# Altium PCB esc_backup.PcbDoc (part 2 of 2)
Units mil, origin at the board's own origin, x right, y up, seen from the top; angles counter-clockwise.
Board outline 1181.1 x 1181.1 mil, 2 copper layers (Top Layer, Bottom Layer); 362 components, 209 nets, 906 pads, 130 vias.
Unrouted connection lines stored in the file: 531.
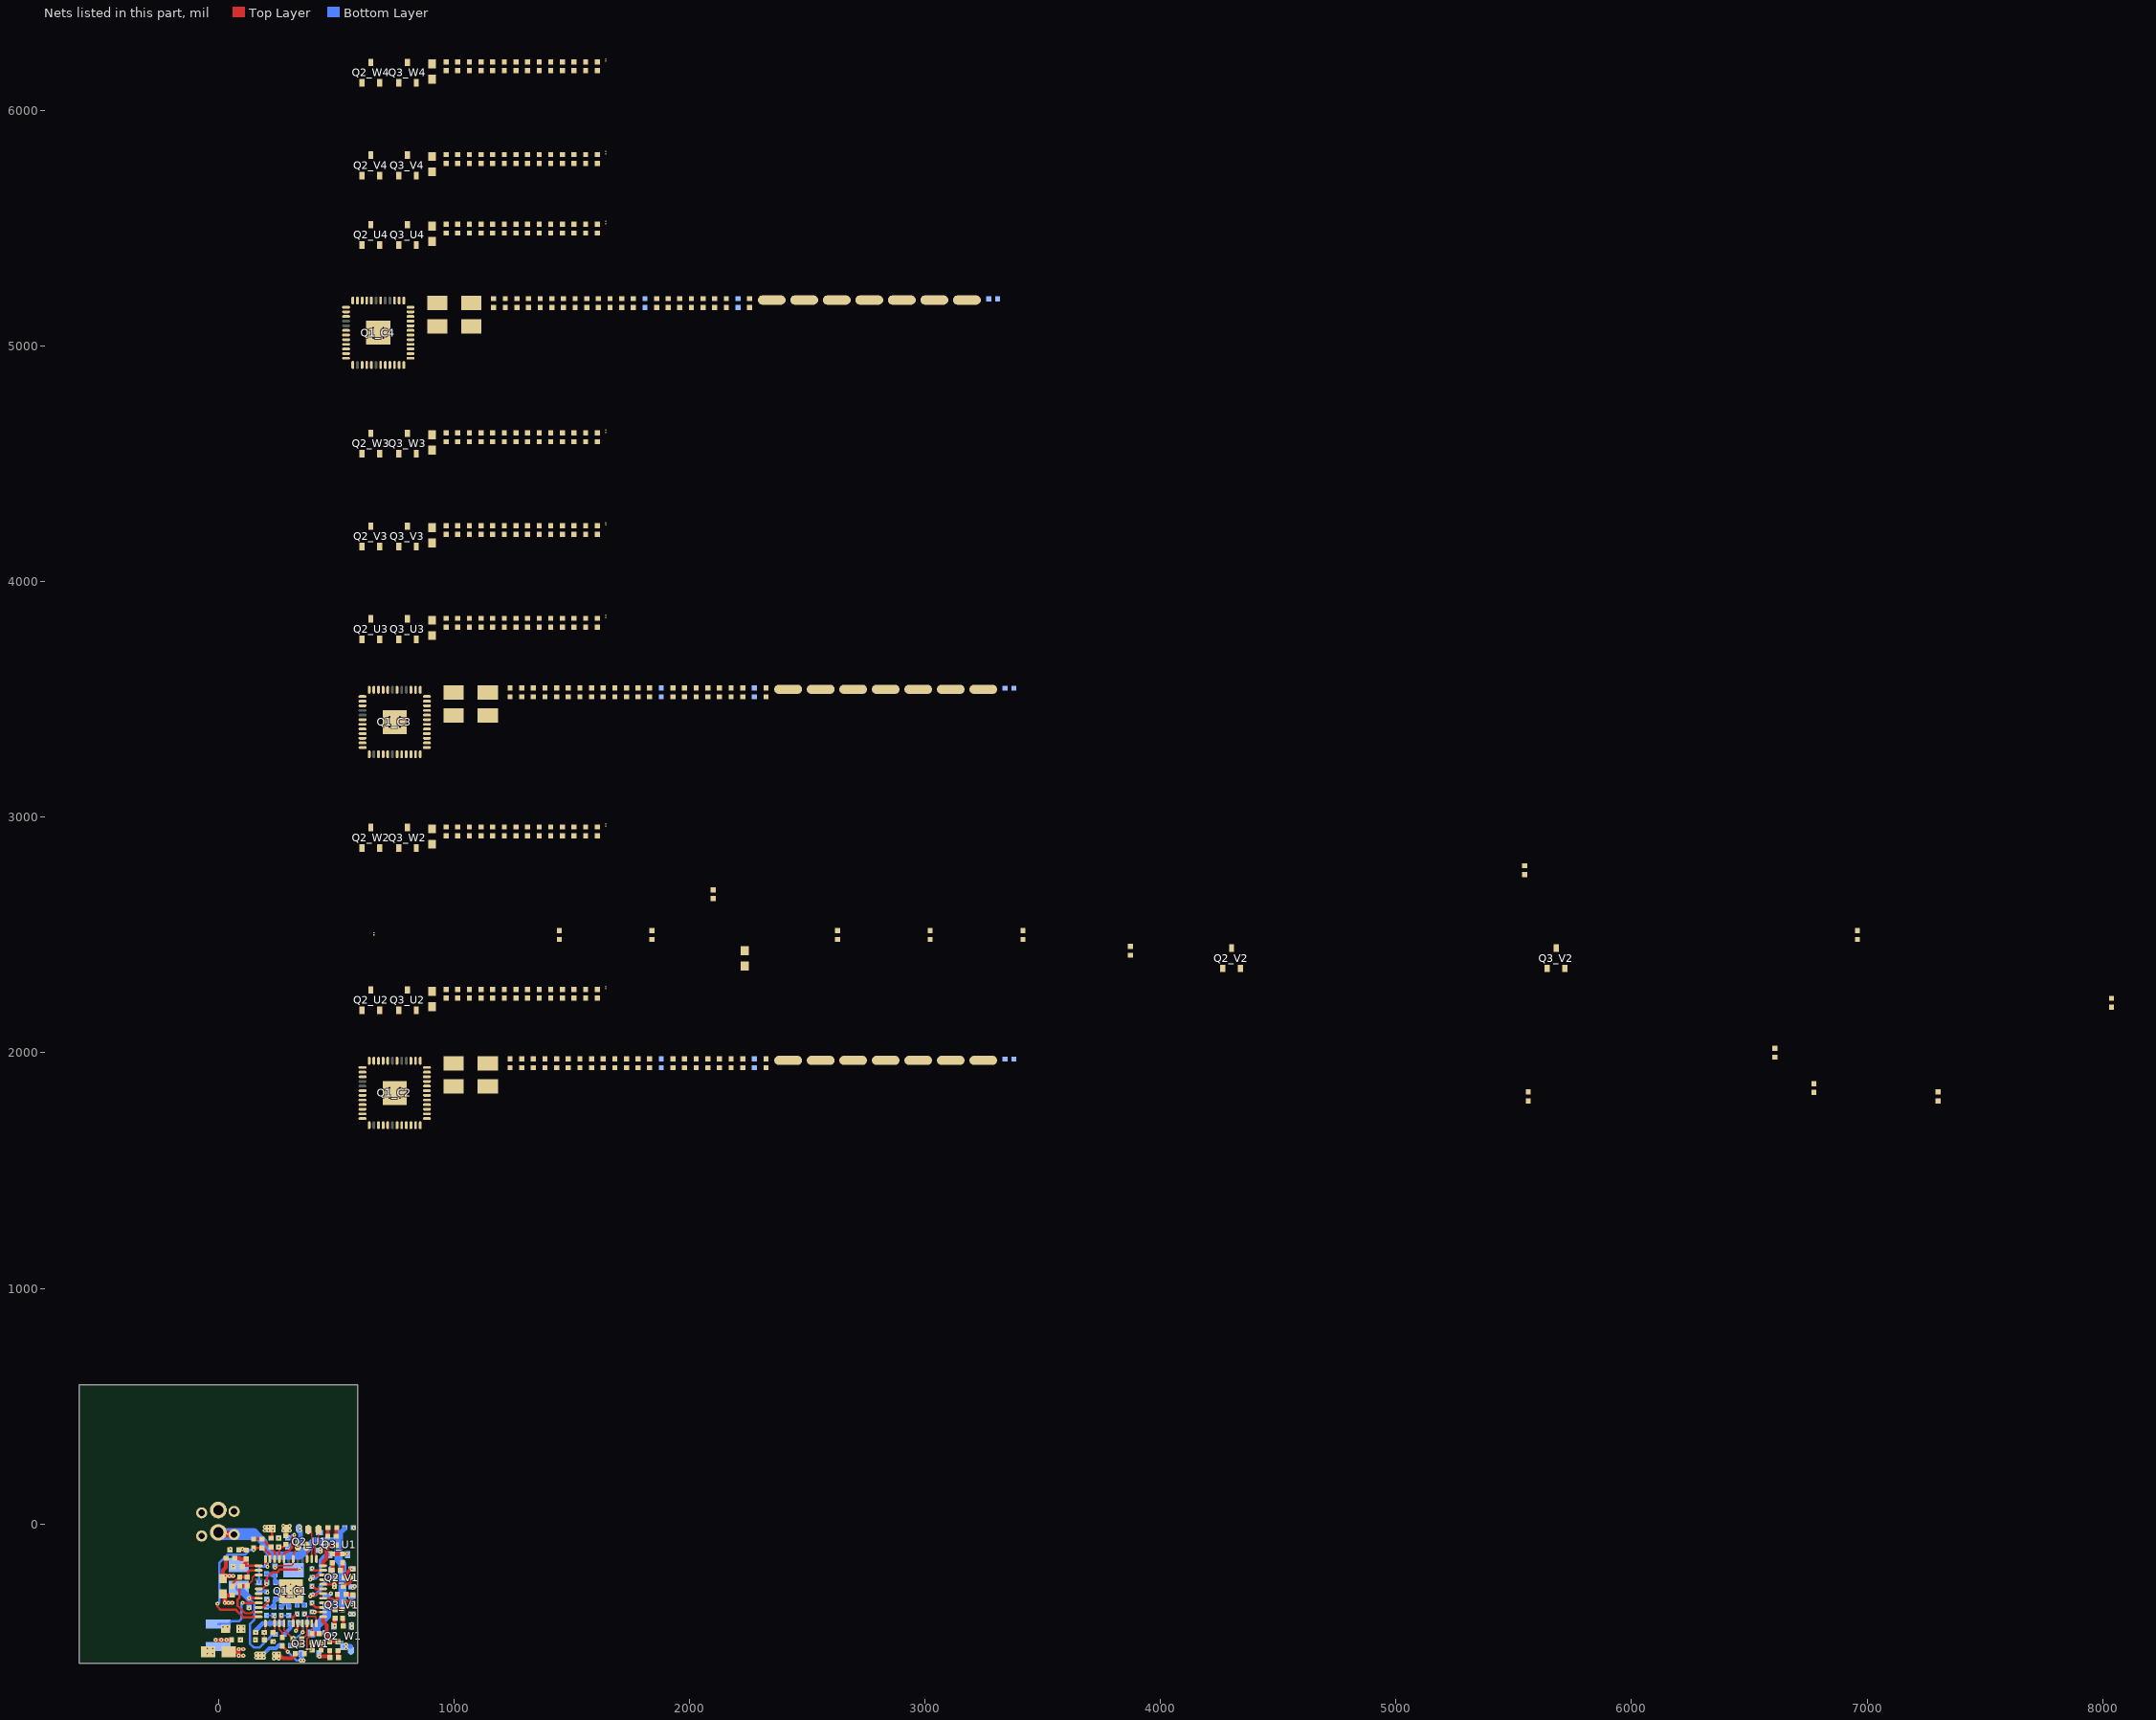
[diagram p2: the nets of this part, all layers, seen from the top]

## Part data
12V BT_C1 BT_C2 BT_C3 BT_C4 CK_C1 CK_C2 CK_C3 CK_C4 G IO_C1 IO_C2 IO_C3 IO_C4 RX_C1 RX_C2 RX_C3 RX_C4 U_C1 U_C2 U_C3 U_C4 V_C1 V_C2 V_C3 V_C4 W_C1 W_C2 W_C3 W_C4: library part Socket, "Socket", LatestRevisionDate=17-Jul-2002, LatestRevisionNote="Re-released for DXP Platform.", Publisher="Altium Limited"
C1_C1 C1_C2 C1_C3 C1_C4 C2_C1 C2_C2 C2_C3 C2_C4 C3_C1 C3_C2 C3_C3 C3_C4 C5_C1 C5_C2 C5_C3 C5_C4 C6_C1 C6_C2 C6_C3 C6_C4 C7_C1 C7_C2 C7_C3 C7_C4 C8_C1 C8_C2 C8_C3 C8_C4 C9_C1 C9_C2 C9_C3 C9_C4 C10_C1 C10_C2 C10_C3 C10_C4 C11_C1 C11_C2 C11_C3 C11_C4 C12_C1 C12_C2 C12_C3 C12_C4 C14_C1 C14_C2 C14_C3 C14_C4 C15_C1 C15_C2 C15_C3 C15_C4 C16_U1 C16_U2 C16_U3 C16_U4 C16_V1 C16_V2 C16_V3 C16_V4 C16_W1 C16_W2 C16_W3 C16_W4 C17_U1 C17_U2 C17_U3 C17_U4 C17_V1 C17_V2 C17_V3 C17_V4 C17_W1 C17_W2 C17_W3 C17_W4 C18_U1 C18_U2 C18_U3 C18_U4 C18_V1 C18_V2 C18_V3 C18_V4 C18_W1 C18_W2 C18_W3 C18_W4 C19_U1 C19_U2 C19_U3 C19_U4 C19_V1 C19_V2 C19_V3 C19_V4 C19_W1 C19_W2 C19_W3 C19_W4 C23: library part Cap, "Capacitor", LatestRevisionDate=17-Jul-2002, LatestRevisionNote="Re-released for DXP Platform.", PackageDescription="Radial Cap, Thru-Hole; 2 Leads; 0.3 in Pin Spacing", PackageReference=RAD-0.3, Published=8-Jun-2000, Publisher="Altium Limited"
C4_C1 C4_C2 C4_C3 C4_C4 C13_C1 C13_C2 C13_C3 C13_C4 C20 C21 C22: library part "Cap Pol3", "Polarized Capacitor (Surface Mount)", LatestRevisionDate=29-May-2009, LatestRevisionNote="IPC-7351 Footprint Added.", PackageDescription="Chip Capacitor", PackageReference=C0805, Published=8-Jun-2000, Publisher="Altium Limited"
D1_U1 D1_U2 D1_U3 D1_U4 D1_V1 D1_V2 D1_V3 D1_V4 D1_W1 D1_W2 D1_W3 D1_W4 D2_U1 D2_U2 D2_U3 D2_U4 D2_V1 D2_V2 D2_V3 D2_V4 D2_W1 D2_W2 D2_W3 D2_W4 D3: library part Diode, "Default Diode", Code_JEDEC=DO-214-AB, LatestRevisionDate=17-Jul-2002, LatestRevisionNote="Re-released for DXP Platform.", PackageDescription="DO-214-AB/SMC; 2 C-Bend Leads; Body 7.9 x 5.9 mm, inc. leads (LxW)", PackageReference=SMC, PackageVersion=Sep-1996, Published=8-Jun-2000, Publisher="Altium Limited"
L1: library part Inductor, "Inductor", Code_IEC=1005, Code_JEITA=0402, LatestRevisionDate=29-May-2009, LatestRevisionNote="IPC-7351 Footprint Added.", PackageDescription="Chip Inductor", PackageReference=0402-A, Published=8-Jun-2000, Publisher="Altium Limited"
Q2_U1 Q2_U2 Q2_U3 Q2_U4 Q2_V1 Q2_V2 Q2_V3 Q2_V4 Q2_W1 Q2_W2 Q2_W3 Q2_W4 Q3_U1 Q3_U2 Q3_U3 Q3_U4 Q3_V1 Q3_V2 Q3_V3 Q3_V4 Q3_W1 Q3_W2 Q3_W3 Q3_W4: library part MOSFET-N, "N-Channel MOSFET", LatestRevisionDate=17-Jul-2002, LatestRevisionNote="Re-released for DXP Platform.", PackageDescription="TO, Flat Index; 3 In-Line, Axial Leads; Body Dia. 4.6mm; Lead Dia. 0.5 mm (max)", PackageReference=E3, PackageVersion=1995/1996, Published=8-Jun-2000, Publisher="Altium Limited"
R1_U1 R1_U2 R1_U3 R1_U4 R1_V1 R1_V2 R1_V3 R1_V4 R1_W1 R1_W2 R1_W3 R1_W4 R2_U1 R2_U2 R2_U3 R2_U4 R2_V1 R2_V2 R2_V3 R2_V4 R2_W1 R2_W2 R2_W3 R2_W4 R3_U1 R3_U2 R3_U3 R3_U4 R3_V1 R3_V2 R3_V3 R3_V4 R3_W1 R3_W2 R3_W3 R3_W4 R4_U1 R4_U2 R4_U3 R4_U4 R4_V1 R4_V2 R4_V3 R4_V4 R4_W1 R4_W2 R4_W3 R4_W4 R5_U1 R5_U2 R5_U3 R5_U4 R5_V1 R5_V2 R5_V3 R5_V4 R5_W1 R5_W2 R5_W3 R5_W4 R6_C1 R6_C2 R6_C3 R6_C4 R7_C1 R7_C2 R7_C3 R7_C4 R8_C1 R8_C2 R8_C3 R8_C4 R9_C1 R9_C2 R9_C3 R9_C4 R10_C1 R10_C2 R10_C3 R10_C4 R11_C1 R11_C2 R11_C3 R11_C4 R12_C1 R12_C2 R12_C3 R12_C4 R13_C1 R13_C2 R13_C3 R13_C4 R14_C1 R14_C2 R14_C3 R14_C4 R15_C1 R15_C2 R15_C3 R15_C4 R16_C1 R16_C2 R16_C3 R16_C4 R17_U1 R17_U2 R17_U3 R17_U4 R17_V1 R17_V2 R17_V3 R17_V4 R17_W1 R17_W2 R17_W3 R17_W4 R18_U1 R18_U2 R18_U3 R18_U4 R18_V1 R18_V2 R18_V3 R18_V4 R18_W1 R18_W2 R18_W3 R18_W4 R19_U1 R19_U2 R19_U3 R19_U4 R19_V1 R19_V2 R19_V3 R19_V4 R19_W1 R19_W2 R19_W3 R19_W4 R20_U1 R20_U2 R20_U3 R20_U4 R20_V1 R20_V2 R20_V3 R20_V4 R20_W1 R20_W2 R20_W3 R20_W4: library part Res3, "Resistor", LatestRevisionDate=29-May-2009, LatestRevisionNote="IPC-7351 Footprint Added.", PackageDescription="Chip Resistor", PackageReference=J1-0603, Published=8-Jun-2000, Publisher="Altium Limited"

## Via types
v1: diameter 17.72, hole 5.91, Top Layer to Bottom Layer, tented both sides, 114 vias
v2: diameter 19.68, hole 7.87, Top Layer to Bottom Layer, 16 vias

## Nets (pads, with @x,y where several pads share a name; then routed paths per layer and width w, separated by ;. In a path a pad name is that pad's centre, name@x,y a point inside that pad or via, vN(x,y) a via of type N, cw(c..) or ccw(c..) an arc to the next point about the centre after c; other vN are vias at no path point)
GND: C1_C1.1 C1_C2.1 C1_C3.1 C1_C4.1 C2_C1.2 C2_C2.2 C2_C3.2 C2_C4.2 C4_C1.2 C4_C2.2 C4_C3.2 C4_C4.2 C5_C1.1 C5_C2.1 C5_C3.1 C5_C4.1 C6_C1.1 C6_C2.1 C6_C3.1 C6_C4.1 C8_C1.2 C8_C2.2 C8_C3.2 C8_C4.2 C10_C1.2 C10_C2.2 C10_C3.2 C10_C4.2 C11_C1.1 C11_C2.1 C11_C3.1 C11_C4.1 C12_C1.2 C12_C2.2 C12_C3.2 C12_C4.2 C13_C1.2 C13_C2.2 C13_C3.2 C13_C4.2 C14_C1.2 C14_C2.2 C14_C3.2 C14_C4.2 C15_C1.2 C15_C2.2 C15_C3.2 C15_C4.2 C16_U1.1 C16_U2.1 C16_U3.1 C16_U4.1 C16_V1.1 C16_V2.1 C16_V3.1 C16_V4.1 C16_W1.1 C16_W2.1 C16_W3.1 C16_W4.1 C17_U1.2 C17_U2.2 C17_U3.2 C17_U4.2 C17_V1.2 C17_V2.2 C17_V3.2 C17_V4.2 C17_W1.2 C17_W2.2 C17_W3.2 C17_W4.2 C18_U1.1 C18_U2.1 C18_U3.1 C18_U4.1 C18_V1.1 C18_V2.1 C18_V3.1 C18_V4.1 C18_W1.1 C18_W2.1 C18_W3.1 C18_W4.1 C20.2 C21.2 C22.2 C23.1 D3.1 G.1 N1_U1.1 N1_U2.1 N1_U3.1 N1_U4.1 N1_V1.1 N1_V2.1 N1_V3.1 N1_V4.1 N1_W1.1 N1_W2.1 N1_W3.1 N1_W4.1 Q1_C1.20 Q1_C1.44 Q1_C1.EPAD Q1_C2.20 Q1_C2.44 Q1_C2.EPAD Q1_C3.20 Q1_C3.44 Q1_C3.EPAD Q1_C4.20 Q1_C4.44 Q1_C4.EPAD R6_C1.1 R6_C2.1 R6_C3.1 R6_C4.1 R7_C1.1 R7_C2.1 R7_C3.1 R7_C4.1 R10_C1.2 R10_C2.2 R10_C3.2 R10_C4.2 R13_C1.2 R13_C2.2 R13_C3.2 R13_C4.2 R16_C1.1 R16_C2.1 R16_C3.1 R16_C4.1 | length 1078.7
  Top Layer w6: Q1_C1.20@337.6,-422.24 Q1_C1.20@338.58,-423.23
  Top Layer w10: Q1_C1.44@278.54,-148.62 278.54,-126.97 287.4,-118.11 295.28,-118.11 312.8,-100.58 312.8,-57.28 v1(322.55,-47.53) ; v1(329.57,-452.76) 329.99,-452.76 335.82,-446.93 335.82,-424.02 Q1_C1.20@337.6,-422.24
  Top Layer w16: C20.2@43.31,-543.31 86.61,-543.31 ; v1(106.3,-559.06) v1(86.61,-559.06) 86.61,-543.31 ; v1(106.3,-531.5) v1(86.61,-531.5) 86.61,-543.31 ; C17_W1.2@397.64,-502.95 398.62,-503.94 v1(398.62,-519.68) C18_W1.1@398.62,-535.43
  Bottom Layer w6: C16_V1.1@452.76,-460.63 C16_V1.1@460.63,-468.5
  Bottom Layer w10: C5_C1.1@204.72,-351.38 R10_C1.2@236.22,-351.38 ; C17_U1.2@294.29,-98.43 314.77,-77.94 314.77,-59.01 322.55,-51.23 v1(322.55,-47.53) 314.67,-47.53 303.15,-59.06 C18_U1.1@294.29,-59.06
  Bottom Layer w16: C1_C1.1@204.72,-211.61 219.49,-211.61 224.41,-216.54 239.17,-216.54 R7_C1.1@240.16,-215.55 240.16,-245.08 C6_C1.1@243.11,-248.03 270.67,-248.03 v2(286.42,-263.78) 262.8,-287.4 C8_C1.2@242.13,-287.4 ; R10_C1.2@236.22,-351.38 236.22,-325.79 C10_C1.2@243.11,-318.9 274.61,-318.9 v2(286.42,-307.09) ; C11_C1.1@267.72,-351.38 286.42,-332.68 v2(286.42,-307.09) ; R13_C1.2@299.21,-351.38 299.21,-319.88 298.72,-319.39 v2(286.42,-307.09) ; v2(329.72,-307.09) 329.72,-308.07 C4_C1.2@334.65,-312.99 ; C15_C1.2@334.65,-344.49 C4_C1.2@334.65,-312.99 ; C14_C1.2@366.14,-344.49 C4_C1.2@334.65,-312.99 ; C16_W1.1@452.76,-304.13 471.46,-304.13 478.24,-297.35 v1(478.24,-295.28) ; C16_V1.1@460.63,-468.5 v1(492.13,-468.5)
  Bottom Layer w20: v1(158.46,-460.63) 158.46,-452.34 189.54,-421.26 R16_C1.1@268.7,-421.26
  other v1: 161.42,-566.93 161.42,-551.18 93.5,-492.13 86.61,-452.76 106.3,-452.76 86.61,-437.01 106.3,-437.01 129.92,-358.27 27.56,-334.65 43.31,-334.65 59.06,-334.65 307.09,-311.02 275.59,-283.46 307.09,-283.46 342.52,-283.46 307.09,-255.91 63.98,-181.1 51.18,-106.3 196.85,-27.56 574.8,-15.75 196.85,-11.81
  other v2: 329.72,-263.78 727.18,1807.78 770.49,1807.78 727.18,1851.09 770.49,1851.09 727.18,3382.58 770.49,3382.58 727.18,3425.89 770.49,3425.89 657.57,5035.18 700.88,5035.18 657.57,5078.49 700.88,5078.49
NetBT_C1_1: BT_C1.1 Q1_C1.42 R7_C1.2 | length 175.1
  Top Layer w6: v1(240.16,-185.04) 248.44,-185.04 256.32,-177.17 311.02,-177.17 317.91,-170.28 Q1_C1.42@317.91,-148.62 318.9,-147.64 318.9,-122.05 338.58,-102.36 BT_C1.1@338.58,-94.49
  Bottom Layer w10: v1(240.16,-185.04) R7_C1.2@240.16,-178.15
NetBT_C2_1: BT_C2.1 Q1_C2.42 R7_C2.2
NetBT_C3_1: BT_C3.1 Q1_C3.42 R7_C3.2
NetBT_C4_1: BT_C4.1 Q1_C4.42 R7_C4.2
NetC3_C1_1: C3_C1.1 Q1_C1.35 | length 50.5
  Top Layer w10: v1(397.64,-188.98) 405.51,-196.85 Q1_C1.35@444.88,-196.85
NetC3_C1_2: C3_C1.2 Q1_C1.34 Q2_U1.D Q3_U1.S R8_C1.1 U_C1.1 | length 259
  Top Layer w10: v1(401.57,-224.41) 409.45,-224.41 417.01,-216.85 Q1_C1.34@444.88,-216.85
  Bottom Layer w16: v1(401.57,-224.41) 407.04,-224.41 410.98,-228.35 433.07,-206.25 433.07,-153.54 448.58,-138.03 451.1,-138.03 459.21,-129.92 Q3_U1.S@474.41,-129.92
  Bottom Layer w20: Q2_U1.D@342.52,-74.8 348.69,-68.63 348.69,-29.8 v1(346.46,-27.56) v1(346.46,-11.81)
  other v1: 157.48,-492.13 389.76,-236.22
NetC3_C2_1: C3_C2.1 Q1_C2.35
NetC3_C2_2: C3_C2.2 Q1_C2.34 Q2_U2.D Q3_U2.S R8_C2.1 U_C2.1
NetC3_C3_1: C3_C3.1 Q1_C3.35
NetC3_C3_2: C3_C3.2 Q1_C3.34 Q2_U3.D Q3_U3.S R8_C3.1 U_C3.1
NetC3_C4_1: C3_C4.1 Q1_C4.35
NetC3_C4_2: C3_C4.2 Q1_C4.34 Q2_U4.D Q3_U4.S R8_C4.1 U_C4.1
NetC4_C1_1: C4_C1.1 C6_C1.2 Q1_C1.6 | length 236.9
  Top Layer w10: Q1_C1.6@171.26,-275.59 173.04,-273.81 189.5,-273.81 205.71,-257.61 v1(205.71,-255.91) 205.71,-229.71 229.52,-205.9 248.8,-205.9 261.78,-192.91 v1(346.46,-192.91)
  Bottom Layer w10: v1(346.46,-192.91) C4_C1.1@354.33,-185.04
NetC4_C2_1: C4_C2.1 C6_C2.2 Q1_C2.6
NetC4_C3_1: C4_C3.1 C6_C3.2 Q1_C3.6
NetC4_C4_1: C4_C4.1 C6_C4.2 Q1_C4.6
NetC7_C1_1: C7_C1.1 Q1_C1.31 | length 61.2
  Top Layer w10: v1(397.64,-264.76) 402.56,-264.76 413.39,-275.59 Q1_C1.31@444.88,-275.59
  Bottom Layer w10: v1(397.64,-264.76) 401.57,-264.76 C7_C1.1@405.51,-268.7
NetC7_C1_2: C7_C1.2 Q1_C1.30 Q2_V1.D Q3_V1.S R9_C1.2 V_C1.1 | length 248.9
  Top Layer w10: v1(389.76,-307.09) 407.51,-307.09 420.49,-294.1 443.39,-294.1 Q1_C1.30@444.88,-295.59
  Bottom Layer w10: v1(389.76,-307.09) 404.53,-307.09 412.16,-299.45 412.4,-299.21 ; Q2_V1.D@480.31,-233.71 Q2_V1.D@480.31,-228.35 Q2_V1.D@480.31,-224.41
  Bottom Layer w16: C7_C1.2@402.07,-300.08 401.88,-299.75 v1(401.57,-299.21) ; 412.4,-299.21 v1(401.57,-299.21) ; Q2_V1.D@480.31,-233.71 467.08,-233.71 432.83,-267.95 432.83,-279.76 431.34,-281.26 431.34,-281.8 413.66,-299.48 412.16,-299.45 v1(401.57,-299.21)
  Bottom Layer w20: Q2_V1.D@480.32,-224.41 V_C1.1@480.32,-196.85
  other v1: 236.22,-500 559.06,-381.89 574.8,-381.89
NetC7_C2_1: C7_C2.1 Q1_C2.31
NetC7_C2_2: C7_C2.2 Q1_C2.30 Q2_V2.D Q3_V2.S R9_C2.2 V_C2.1
NetC7_C3_1: C7_C3.1 Q1_C3.31
NetC7_C3_2: C7_C3.2 Q1_C3.30 Q2_V3.D Q3_V3.S R9_C3.2 V_C3.1
NetC7_C4_1: C7_C4.1 Q1_C4.31
NetC7_C4_2: C7_C4.2 Q1_C4.30 Q2_V4.D Q3_V4.S R9_C4.2 V_C4.1
NetC8_C1_1: C8_C1.1 Q1_C1.7 R11_C1.2 | length 41
  Bottom Layer w10: R11_C1.2@169.29,-287.4 C8_C1.1@204.72,-287.4 v1(208.66,-291.34)
NetC8_C2_1: C8_C2.1 Q1_C2.7 R11_C2.2
NetC8_C3_1: C8_C3.1 Q1_C3.7 R11_C3.2
NetC8_C4_1: C8_C4.1 Q1_C4.7 R11_C4.2
NetC9_C1_1: C9_C1.1 Q1_C1.27 | length 56.7
  Top Layer w10: v1(397.64,-335.63) 397.64,-338.58 412.21,-353.16 443.71,-353.16 Q1_C1.27@444.88,-354.33
NetC9_C1_2: C9_C1.2 Q1_C1.26 Q2_W1.D Q3_W1.S R12_C1.2 W_C1.1 | length 213.3
  Top Layer w6: v1(295.28,-543.31) v1@295.28,-542.32
  Top Layer w10: R12_C1.2@271.65,-518.7 v1@295.28,-542.32 ; v1(397.64,-373.03) 443.9,-373.03 Q1_C1.26@444.88,-374.02
  Bottom Layer w10: v1(295.28,-543.31) 330.71,-578.74 v1(350.39,-578.74) ; v1@539.37,-519.68 543.31,-515.75 v1(543.31,-511.81)
  Bottom Layer w20: v1(350.39,-578.74) 352.36,-576.77 Q3_W1.S@352.36,-551.18 ; v1@539.37,-519.68 W_C1.1@562.99,-519.68
  other v1: 362.2,-578.74 543.31,-527.56 409.45,-374.02
NetC9_C2_1: C9_C2.1 Q1_C2.27
NetC9_C2_2: C9_C2.2 Q1_C2.26 Q2_W2.D Q3_W2.S R12_C2.2 W_C2.1
NetC9_C3_1: C9_C3.1 Q1_C3.27
NetC9_C3_2: C9_C3.2 Q1_C3.26 Q2_W3.D Q3_W3.S R12_C3.2 W_C3.1
NetC9_C4_1: C9_C4.1 Q1_C4.27
NetC9_C4_2: C9_C4.2 Q1_C4.26 Q2_W4.D Q3_W4.S R12_C4.2 W_C4.1
NetC14_C1_1: C14_C1.1 Q1_C1.24 R15_C1.2 | length 124.9
  Top Layer w6: v1(366.14,-381.89) 377.13,-392.87 410.39,-392.87 415.51,-398 415.51,-421.42 Q1_C1.24@416.34,-422.24
  Bottom Layer w6: v1(366.14,-381.89) 377.95,-393.7 R15_C1.2@377.95,-421.26
NetC14_C2_1: C14_C2.1 Q1_C2.24 R15_C2.2
NetC14_C3_1: C14_C3.1 Q1_C3.24 R15_C3.2
NetC14_C4_1: C14_C4.1 Q1_C4.24 R15_C4.2
NetC15_C1_1: C15_C1.1 Q1_C1.19 R14_C1.1 R16_C1.2 | length 113.4
  Top Layer w10: Q1_C1.19@317.91,-422.24 317.91,-394.69 334.65,-377.95 v1(334.65,-381.89)
  Bottom Layer w16: R14_C1.1@279.53,-468.5 306.1,-441.93 R16_C1.2@306.1,-421.26
NetC15_C2_1: C15_C2.1 Q1_C2.19 R14_C2.1 R16_C2.2
NetC15_C3_1: C15_C3.1 Q1_C3.19 R14_C3.1 R16_C3.2
NetC15_C4_1: C15_C4.1 Q1_C4.19 R14_C4.1 R16_C4.2
NetCK_C1_1: CK_C1.1 Q1_C1.38 | length 132.1
  Top Layer w6: CK_C1.1@381.89,-23.62 396.65,-38.39 396.65,-77.59 397.8,-78.73 397.8,-110.24 396.65,-111.38 Q1_C1.38@396.65,-148.62
NetCK_C2_1: CK_C2.1 Q1_C2.38
NetCK_C3_1: CK_C3.1 Q1_C3.38
NetCK_C4_1: CK_C4.1 Q1_C4.38
NetD1_U1_1: D1_U1.1 Q3_U1.G R2_U1.2 | length 66.2
  Top Layer w16: R2_U1.2@484.25,-126.97 D1_U1.1@527.56,-126.97 v1(546.26,-126.97)
  Bottom Layer w16: v1(546.26,-126.97) Q3_U1.G@549.21,-129.92
NetD1_U1_2: D1_U1.2 R1_U1.2 | length 34.1
  Top Layer w16: R1_U1.2@523.62,-196.85 527.56,-192.91 D1_U1.2@527.56,-164.37
NetD1_U2_1: D1_U2.1 Q3_U2.G R2_U2.2
NetD1_U2_2: D1_U2.2 R1_U2.2
NetD1_U3_1: D1_U3.1 Q3_U3.G R2_U3.2
NetD1_U3_2: D1_U3.2 R1_U3.2
NetD1_U4_1: D1_U4.1 Q3_U4.G R2_U4.2
NetD1_U4_2: D1_U4.2 R1_U4.2
NetD1_V1_1: D1_V1.1 Q3_V1.G R2_V1.2 | length 74.7
  Top Layer w16: R2_V1.2@534.45,-330.71 563.98,-330.71 D1_V1.1@570.87,-337.6
  Bottom Layer w16: v1(566.93,-342.52) Q3_V1.G@566.93,-307.09
NetD1_V1_2: D1_V1.2 R1_V1.2 | length 29
  Top Layer w16: R1_V1.2@542.32,-299.21 569.88,-299.21 D1_V1.2@570.87,-300.2
NetD1_V2_1: D1_V2.1 Q3_V2.G R2_V2.2
NetD1_V2_2: D1_V2.2 R1_V2.2
NetD1_V3_1: D1_V3.1 Q3_V3.G R2_V3.2
NetD1_V3_2: D1_V3.2 R1_V3.2
NetD1_V4_1: D1_V4.1 Q3_V4.G R2_V4.2
NetD1_V4_2: D1_V4.2 R1_V4.2
NetD1_W1_1: D1_W1.1 Q3_W1.G R2_W1.2 | length 74
  Top Layer w16: v1(429.13,-562.99) 430.86,-561.26 D1_W1.1@472.44,-561.26 ; R2_W1.2@472.44,-537.4 D1_W1.1@472.44,-561.26 ; D1_W1.1@473.43,-566.93 472.44,-565.94 D1_W1.1@472.44,-561.26
NetD1_W1_2: D1_W1.2 R1_W1.2 | length 30.8
  Top Layer w16: R1_W1.2@507.87,-537.4 507.87,-563.98 D1_W1.2@510.83,-566.93
NetD1_W2_1: D1_W2.1 Q3_W2.G R2_W2.2
NetD1_W2_2: D1_W2.2 R1_W2.2
NetD1_W3_1: D1_W3.1 Q3_W3.G R2_W3.2
NetD1_W3_2: D1_W3.2 R1_W3.2
NetD1_W4_1: D1_W4.1 Q3_W4.G R2_W4.2
NetD1_W4_2: D1_W4.2 R1_W4.2
NetD2_U1_1: D2_U1.1 Q2_U1.G R4_U1.2 | length 36.8
  Top Layer w16: R4_U1.2@464.57,-52.17 464.57,-16.73 D2_U1.1@465.55,-15.75
NetD2_U1_2: D2_U1.2 R3_U1.2 | length 37.6
  Top Layer w16: R3_U1.2@500,-52.17 500,-18.7 D2_U1.2@502.95,-15.75
NetD2_U2_1: D2_U2.1 Q2_U2.G R4_U2.2
NetD2_U2_2: D2_U2.2 R3_U2.2
NetD2_U3_1: D2_U3.1 Q2_U3.G R4_U3.2
NetD2_U3_2: D2_U3.2 R3_U3.2
NetD2_U4_1: D2_U4.1 Q2_U4.G R4_U4.2
NetD2_U4_2: D2_U4.2 R3_U4.2
NetD2_V1_1: D2_V1.1 Q2_V1.G R4_V1.2 | length 58.1
  Top Layer w16: R4_V1.2@534.45,-228.35 534.45,-226.38 545.04,-215.79 545.04,-207.96 563.04,-189.96 D2_V1.1@570.87,-189.96
  other v1: 566.93,-190.94
NetD2_V1_2: D2_V1.2 R3_V1.2 | length 65
  Top Layer w16: R3_V1.2@530.51,-263.78 534.45,-263.78 535.2,-263.03 535.2,-254.17 551.49,-254.17 570.87,-234.8 D2_V1.2@570.87,-227.36
NetD2_V2_1: D2_V2.1 Q2_V2.G R4_V2.2
NetD2_V2_2: D2_V2.2 R3_V2.2
NetD2_V3_1: D2_V3.1 Q2_V3.G R4_V3.2
NetD2_V3_2: D2_V3.2 R3_V3.2
NetD2_V4_1: D2_V4.1 Q2_V4.G R4_V4.2
NetD2_V4_2: D2_V4.2 R3_V4.2
NetD2_W1_1: D2_W1.1 Q2_W1.G R4_W1.2 | length 37.6
  Top Layer w16: v1(493.11,-433.07) 493.11,-399.61 R4_W1.2@496.06,-396.65
NetD2_W1_2: D2_W1.2 R3_W1.2 | length 37.6
  Top Layer w16: R3_W1.2@527.56,-396.65 530.51,-399.61 D2_W1.2@530.51,-433.07
NetD2_W2_1: D2_W2.1 Q2_W2.G R4_W2.2
NetD2_W2_2: D2_W2.2 R3_W2.2
NetD2_W3_1: D2_W3.1 Q2_W3.G R4_W3.2
NetD2_W3_2: D2_W3.2 R3_W3.2
NetD2_W4_1: D2_W4.1 Q2_W4.G R4_W4.2
NetD2_W4_2: D2_W4.2 R3_W4.2
NetD3_2: D3.2 L1.2 Q1_C1.9 | length 246.2
  Top Layer w10: v1(103.18,-334.65) 120.11,-334.65 121.28,-335.82 170.09,-335.82 Q1_C1.9@171.26,-334.65
  Bottom Layer w10: L1.2@0,-425.2 39.37,-425.2 43.31,-425.2 55.12,-413.39 86.61,-413.39 98.43,-401.57 98.43,-339.4 v1(103.18,-334.65)
  other v1: 19.68,-437.01 39.37,-437.01
NetIO_C1_1: IO_C1.1 Q1_C1.37 | length 133.3
  Top Layer w6: Q1_C1.37@416.34,-148.62 416.34,-132.87 410.8,-127.33 410.8,-93.14 425.2,-78.74 IO_C1.1@425.2,-23.62
NetIO_C2_1: IO_C2.1 Q1_C2.37
NetIO_C3_1: IO_C3.1 Q1_C3.37
NetIO_C4_1: IO_C4.1 Q1_C4.37
NetN1_U1_2: N1_U1.2 R5_U1.1 R19_U1.1 | length 59.2
  Top Layer w6: R5_U1.1@217.68,-11.81 217.68,-19.68 R5_U1.1@223.43,-19.68
  Top Layer w10: R19_U1.1@224.41,-63.98 227.63,-60.76 R5_U1.1@227.63,-19.68
  other v1: 212.6,-27.56 232.28,-27.56 212.6,-11.81 232.28,-11.81
NetN1_U2_2: N1_U2.2 R5_U2.1 R19_U2.1
NetN1_U3_2: N1_U3.2 R5_U3.1 R19_U3.1
NetN1_U4_2: N1_U4.2 R5_U4.1 R19_U4.1
NetN1_V1_2: N1_V1.2 R5_V1.1 R19_V1.1 | length 108.2
  Top Layer w6: R5_V1.1@27.56,-296.26 R5_V1.1@34.45,-303.15
  Top Layer w16: R5_V1.1@34.45,-303.15 R19_V1.1@62.99,-303.15
  Top Layer w20: R5_V1.1@27.56,-296.26 N1_V1.2@27.56,-324.8 27.56,-334.65 59.06,-334.65
NetN1_V2_2: N1_V2.2 R5_V2.1 R19_V2.1
NetN1_V3_2: N1_V3.2 R5_V3.1 R19_V3.1
NetN1_V4_2: N1_V4.2 R5_V4.1 R19_V4.1
NetN1_W1_2: N1_W1.2 R5_W1.1 R19_W1.1 | length 90.5
  Bottom Layer w16: v1(192.91,-551.18) 216.54,-527.56 226.1,-527.56 226.34,-527.32 244.33,-527.32 255.91,-515.75 R19_W1.1@268.7,-515.75
  other v1: 177.17,-566.93 192.91,-566.93 177.17,-551.18
NetN1_W2_2: N1_W2.2 R5_W2.1 R19_W2.1
NetN1_W3_2: N1_W3.2 R5_W3.1 R19_W3.1
NetN1_W4_2: N1_W4.2 R5_W4.1 R19_W4.1
NetQ1_C1_25: Q1_C1.25 R1_W1.1 R2_W1.1 | length 148
  Top Layer w16: Q1_C1.25@444.88,-397.64 444.88,-413.39 460.63,-429.13 460.63,-488.19 469.49,-497.05 R1_W1.1@507.87,-497.05
NetQ1_C1_28: Q1_C1.28 R3_W1.1 R4_W1.1 | length 93.7
  Top Layer w10: Q1_C1.28@444.88,-334.65 462.36,-334.65 486.97,-359.25 R4_W1.1@496.06,-363.19
  Top Layer w16: R4_W1.1@496.06,-363.19 R3_W1.1@527.56,-363.19
NetQ1_C1_29: Q1_C1.29 R1_V1.1 R2_V1.1 | length 93.4
  Top Layer w10: Q1_C1.29@444.88,-314.96 446.06,-316.13 482.47,-316.13 R2_V1.1@497.05,-330.71
  Top Layer w16: R2_V1.1@497.05,-330.71 504.92,-322.83 R1_V1.1@504.92,-299.21
NetQ1_C1_32: Q1_C1.32 R3_V1.1 R4_V1.1 | length 98.1
  Top Layer w10: Q1_C1.32@444.88,-255.91 485.24,-255.91 492.13,-262.8 492.13,-264.76 v1(492.13,-267.72)
  Top Layer w16: R3_V1.1@492.13,-264.76 R3_V1.1@493.11,-263.78 497.05,-259.84 493.11,-255.9 v1(492.12,-255.9) 492.12,-233.27 R4_V1.1@497.05,-228.35
NetQ1_C1_33: Q1_C1.33 R1_U1.1 R2_U1.1 | length 104.4
  Top Layer w6: Q1_C1.33@444.88,-236.22 464.57,-236.22 464.57,-235.37 476.22,-223.72 476.22,-207.52 484.25,-207.52 R1_U1.1@484.25,-194.88
  Top Layer w16: R1_U1.1@484.25,-194.88 R2_U1.1@484.25,-164.37
NetQ1_C1_36: Q1_C1.36 R3_U1.1 R4_U1.1 | length 127.3
  Top Layer w16: Q1_C1.36@444.88,-173.23 444.88,-160.87 458.39,-147.37 458.43,-147.4 458.43,-109.93 464.57,-103.79 R4_U1.1@464.57,-89.57 R3_U1.1@500,-89.57
NetQ1_C1_39: Q1_C1.39 RX_C1.1 | length 55.4
  Top Layer w6: RX_C1.1@374.02,-94.49 376.97,-97.44 Q1_C1.39@376.97,-148.62
NetQ1_C2_9: Q1_C2.9
NetQ1_C2_25: Q1_C2.25 R1_W2.1 R2_W2.1
NetQ1_C2_28: Q1_C2.28 R3_W2.1 R4_W2.1
NetQ1_C2_29: Q1_C2.29 R1_V2.1 R2_V2.1
NetQ1_C2_32: Q1_C2.32 R3_V2.1 R4_V2.1
NetQ1_C2_33: Q1_C2.33 R1_U2.1 R2_U2.1
NetQ1_C2_36: Q1_C2.36 R3_U2.1 R4_U2.1
NetQ1_C2_39: Q1_C2.39 RX_C2.1
NetQ1_C3_9: Q1_C3.9
NetQ1_C3_25: Q1_C3.25 R1_W3.1 R2_W3.1
NetQ1_C3_28: Q1_C3.28 R3_W3.1 R4_W3.1
NetQ1_C3_29: Q1_C3.29 R1_V3.1 R2_V3.1
NetQ1_C3_32: Q1_C3.32 R3_V3.1 R4_V3.1
NetQ1_C3_33: Q1_C3.33 R1_U3.1 R2_U3.1
NetQ1_C3_36: Q1_C3.36 R3_U3.1 R4_U3.1
NetQ1_C3_39: Q1_C3.39 RX_C3.1
NetQ1_C4_9: Q1_C4.9
NetQ1_C4_25: Q1_C4.25 R1_W4.1 R2_W4.1
NetQ1_C4_28: Q1_C4.28 R3_W4.1 R4_W4.1
NetQ1_C4_29: Q1_C4.29 R1_V4.1 R2_V4.1
NetQ1_C4_32: Q1_C4.32 R3_V4.1 R4_V4.1
NetQ1_C4_33: Q1_C4.33 R1_U4.1 R2_U4.1
NetQ1_C4_36: Q1_C4.36 R3_U4.1 R4_U4.1
NetQ1_C4_39: Q1_C4.39 RX_C4.1
NetQ2_U1_S: Q2_U1.S R5_U1.2 R18_U1.1 | length 29.9
  Top Layer w10: R18_U1.1@287.4,-49.21 287.4,-20.67 R5_U1.2@288.39,-19.68
  other v1: 433.07,-118.11 433.07,-106.3 275.59,-27.56 303.15,-27.56 275.59,-7.87 303.15,-7.87
NetQ2_U2_S: Q2_U2.S R5_U2.2 R18_U2.1
NetQ2_U3_S: Q2_U3.S R5_U3.2 R18_U3.1
NetQ2_U4_S: Q2_U4.S R5_U4.2 R18_U4.1
NetQ2_V1_S: Q2_V1.S R5_V1.2 R18_V1.1 | length 143.3
  Top Layer w6: R5_V1.2@19.68,-231.3 28.54,-231.3 31.5,-228.35 v1(31.5,-220.47)
  Top Layer w16: R5_V1.2@19.68,-231.3 19.68,-196.85 32.48,-184.06 R18_V1.1@32.48,-145.67
  Top Layer w20: v1(31.5,-220.47) v1(47.24,-220.47) v1(62.99,-220.47)
  other v1: 570.87,-271.65 578.74,-263.78
NetQ2_V2_S: Q2_V2.S R5_V2.2 R18_V2.1
NetQ2_V3_S: Q2_V3.S R5_V3.2 R18_V3.1
NetQ2_V4_S: Q2_V4.S R5_V4.2 R18_V4.1
NetQ2_W1_S: Q2_W1.S R5_W1.2 R18_W1.1 | length 102.1
  Top Layer w6: R5_W1.2@247.05,-559.06 R5_W1.2@250.16,-562.16
  Top Layer w16: R5_W1.2@247.05,-559.06 263.78,-559.06 275.59,-570.87 312.01,-570.87 R18_W1.1@331.69,-551.18
  other v1: 236.22,-570.87 255.91,-570.87 236.22,-551.18 255.91,-551.18 566.93,-440.94 566.93,-425.2
NetQ2_W2_S: Q2_W2.S R5_W2.2 R18_W2.1
NetQ2_W3_S: Q2_W3.S R5_W3.2 R18_W3.1
NetQ2_W4_S: Q2_W4.S R5_W4.2 R18_W4.1
PS1_C1: C2_C1.1 Q1_C1.13 R6_C1.2 R8_C1.2 | length 71.9
  Top Layer w6: R8_C1.2@194.88,-492.13 195.87,-491.14 v1(195.87,-460.63) 199.8,-456.69 Q1_C1.13@199.8,-422.24
PS1_C2: C2_C2.1 Q1_C2.13 R6_C2.2 R8_C2.2
PS1_C3: C2_C3.1 Q1_C3.13 R6_C3.2 R8_C3.2
PS1_C4: C2_C4.1 Q1_C4.13 R6_C4.2 R8_C4.2
PS2_C1: C5_C1.2 Q1_C1.15 R9_C1.1 R10_C1.1 | length 108.4
  Top Layer w6: R9_C1.1@232.28,-461.61 232.28,-452.76 239.17,-445.87 Q1_C1.15@239.17,-422.24 v1(239.17,-391.73)
  Bottom Layer w6: C5_C1.2@204.72,-388.78 R10_C1.1@236.22,-388.78 v1(239.17,-391.73)
PS2_C2: C5_C2.2 Q1_C2.15 R9_C2.1 R10_C2.1
PS2_C3: C5_C3.2 Q1_C3.15 R9_C3.1 R10_C3.1
PS2_C4: C5_C4.2 Q1_C4.15 R9_C4.1 R10_C4.1
PS3_C1: C11_C1.2 Q1_C1.16 R12_C1.1 R13_C1.1 | length 140.8
  Top Layer w6: v1@267.72,-385.2 v1(267.72,-388.78) 267.72,-399.75 258.86,-408.61 Q1_C1.16@258.86,-422.24 258.86,-447.83 271.65,-460.63 R12_C1.1@271.65,-481.3
  Bottom Layer w6: C11_C1.2@264.7,-385.76 v1(267.72,-388.78) R13_C1.1@299.21,-388.78
PS3_C2: C11_C2.2 Q1_C2.16 R12_C2.1 R13_C2.1
PS3_C3: C11_C3.2 Q1_C3.16 R12_C3.1 R13_C3.1
PS3_C4: C11_C4.2 Q1_C4.16 R12_C4.1 R13_C4.1
SN1_C1: C19_W1.1 Q1_C1.22 R19_W1.2 R20_W1.2 | length 153.8
  Top Layer w6: C19_W1.1@353.35,-488.19 357.13,-488.19 376.81,-468.5 376.81,-422.24 Q1_C1.22@376.97,-422.24
  Top Layer w16: R20_W1.2@353.35,-515.75 C19_W1.1@353.35,-488.19
  Bottom Layer w16: R19_W1.2@306.1,-515.75 v1(354.33,-515.75)
SN1_C2: C19_W2.1 Q1_C2.22 R19_W2.2 R20_W2.2
SN1_C3: C19_W3.1 Q1_C3.22 R19_W3.2 R20_W3.2
SN1_C4: C19_W4.1 Q1_C4.22 R19_W4.2 R20_W4.2
SN2_C1: C19_V1.1 Q1_C1.2 R19_V1.2 R20_V1.2 | length 153.2
  Top Layer w10: R19_V1.2@62.99,-265.75 62.99,-251.73 89.33,-225.39 R20_V1.2@90.55,-225.39 ; C19_V1.1@125.98,-225.39 125.98,-204.72 133.86,-196.85 Q1_C1.2@171.26,-196.85
  Top Layer w16: R20_V1.2@90.55,-225.39 C19_V1.1@122.05,-225.39
SN2_C2: C19_V2.1 Q1_C2.2 R19_V2.2 R20_V2.2
SN2_C3: C19_V3.1 Q1_C3.2 R19_V3.2 R20_V3.2
SN2_C4: C19_V4.1 Q1_C4.2 R19_V4.2 R20_V4.2
SN3_C1: C19_U1.1 Q1_C1.46 R19_U1.2 R20_U1.2 | length 142.7
  Top Layer w10: C19_U1.1@149.61,-63.98 R20_U1.2@185.04,-63.98 186.26,-63.98 207.87,-85.58 207.87,-86.8 218.5,-97.44 R19_U1.2@224.41,-97.44 ; R19_U1.2@224.41,-101.38 224.41,-104.57 239.17,-119.33 Q1_C1.46@239.17,-148.62
SN3_C2: C19_U2.1 Q1_C2.46 R19_U2.2 R20_U2.2
SN3_C3: C19_U3.1 Q1_C3.46 R19_U3.2 R20_U3.2
SN3_C4: C19_U4.1 Q1_C4.46 R19_U4.2 R20_U4.2
SO1_C1: C19_W1.2 Q1_C1.17 Q1_C1.21 R15_C1.1 R20_W1.1 | length 240.6
  Top Layer w6: Q1_C1.17@278.54,-422.24 278.54,-449.14 315.94,-486.54 C19_W1.2@315.94,-488.19 ; v1(357.28,-458.82) Q1_C1.21@357.28,-422.24
  Top Layer w16: R20_W1.1@315.94,-515.75 C19_W1.2@315.94,-488.19
  Bottom Layer w6: v1(318.9,-484.25) 331.85,-484.25 v1(357.28,-458.82) 359.25,-456.85 359.25,-439.96 R15_C1.1@340.55,-421.26
SO1_C2: C19_W2.2 Q1_C2.17 Q1_C2.21 R15_C2.1 R20_W2.1
SO1_C3: C19_W3.2 Q1_C3.17 Q1_C3.21 R15_C3.1 R20_W3.1
SO1_C4: C19_W4.2 Q1_C4.17 Q1_C4.21 R15_C4.1 R20_W4.1
SO2_C1: C19_V1.2 Q1_C1.3 Q1_C1.11 R20_V1.1 | length 299.1
  Top Layer w6: C19_V1.2@122.05,-262.8 144.53,-240.31 144.53,-228.49 156.48,-216.54 Q1_C1.3@171.26,-216.54
  Top Layer w10: R20_V1.1@90.55,-262.8 90.55,-312.72 82.32,-320.94 82.32,-347.53 113.92,-379.13 138.56,-379.13 143.67,-374.02 Q1_C1.11@171.26,-374.02
  Top Layer w16: R20_V1.1@90.55,-262.8 C19_V1.2@122.05,-262.8
SO2_C2: C19_V2.2 Q1_C2.3 Q1_C2.11 R20_V2.1
SO2_C3: C19_V3.2 Q1_C3.3 Q1_C3.11 R20_V3.1
SO2_C4: C19_V4.2 Q1_C4.3 Q1_C4.11 R20_V4.1
SO3_C1: C19_U1.2 Q1_C1.12 Q1_C1.47 R20_U1.1 | length 654.4
  Top Layer w10: v1(-3.94,-338.58) -3.94,-350.39 9.84,-364.17 74.93,-364.17 106.88,-396.13 145.6,-396.13 148.03,-393.7 Q1_C1.12@171.26,-393.7 ; C19_U1.2@149.61,-101.38 R20_U1.1@185.04,-101.38 191.93,-101.38 201.58,-111.03 201.58,-113.24 208.61,-120.27 210.82,-120.27 219.49,-128.94 Q1_C1.47@219.49,-148.62
  Bottom Layer w10: v1(-3.94,-338.58) 3.94,-330.71 3.94,-165.35 31.31,-137.98 31.31,-137.75 38.34,-130.72 112.36,-130.72 132.84,-110.24 v1(149.61,-110.24)
SO3_C2: C19_U2.2 Q1_C2.12 Q1_C2.47 R20_U2.1
SO3_C3: C19_U3.2 Q1_C3.12 Q1_C3.47 R20_U3.1
SO3_C4: C19_U4.2 Q1_C4.12 Q1_C4.47 R20_U4.1
SP1_C1: C17_W1.1 Q1_C1.23 R17_W1.1 R18_W1.2 | length 180.5
  Top Layer w6: R18_W1.2@369.09,-559.06 370.08,-558.07 370.08,-543.31 376.81,-536.57 376.81,-487.98 397.64,-467.16 C17_W1.1@397.64,-465.55 397.64,-423.23 Q1_C1.23@396.65,-422.24
  Top Layer w16: C17_W1.1@397.64,-465.55 R17_W1.1@429.13,-465.55
SP1_C2: C17_W2.1 Q1_C2.23 R17_W2.1 R18_W2.2
SP1_C3: C17_W3.1 Q1_C3.23 R17_W3.1 R18_W3.2
SP1_C4: C17_W4.1 Q1_C4.23 R17_W4.1 R18_W4.2
SP2_C1: C17_V1.1 Q1_C1.1 R17_V1.1 R18_V1.2 | length 161.2
  Top Layer w6: R17_V1.1@121.06,-149.61 122.05,-148.62 122.05,-160.43
  Top Layer w10: C17_V1.1@101.38,-181.1 105.32,-177.17 Q1_C1.1@171.26,-177.17
  Top Layer w16: R18_V1.2@69.88,-145.67 90.55,-145.67 94.49,-149.61 R17_V1.1@121.06,-149.61 ; C17_V1.1@105.32,-177.17 122.05,-160.43
SP2_C2: C17_V2.1 Q1_C2.1 R17_V2.1 R18_V2.2
SP2_C3: C17_V3.1 Q1_C3.1 R17_V3.1 R18_V3.2
SP2_C4: C17_V4.1 Q1_C4.1 R17_V4.1 R18_V4.2
SP3_C1: C17_U1.1 Q1_C1.45 R17_U1.1 R18_U1.2 | length 90.7
  Top Layer w10: Q1_C1.45@258.86,-148.62 258.86,-100.39 v1(255.91,-97.44) 280.51,-97.44 287.4,-90.55 R18_U1.2@287.4,-86.61
SP3_C2: C17_U2.1 Q1_C2.45 R17_U2.1 R18_U2.2
SP3_C3: C17_U3.1 Q1_C3.45 R17_U3.1 R18_U3.2
SP3_C4: C17_U4.1 Q1_C4.45 R17_U4.1 R18_U4.2
VBUS: C16_U1.2 C16_U2.2 C16_U3.2 C16_U4.2 C16_V1.2 C16_V2.2 C16_V3.2 C16_V4.2 C16_W1.2 C16_W2.2 C16_W3.2 C16_W4.2 C21.1 C22.1 N3.2 Q3_U1.D Q3_U2.D Q3_U3.D Q3_U4.D Q3_V1.D Q3_V2.D Q3_V3.D Q3_V4.D Q3_W1.D Q3_W2.D Q3_W3.D Q3_W4.D | length 979.2
  Bottom Layer w6: C16_V1.2@411.42,-464.57 C16_V1.2@415.35,-460.63
  Bottom Layer w20: Q3_U1.D@512.8,-43.31 C16_U1.2@536.42,-19.68
  Bottom Layer w35: 161.42,-47.24 192.91,-78.74 192.91,-94.49 232.28,-133.86 346.26,-133.86 407.17,-72.94 509.95,-72.94 511.81,-74.8 ; 401.57,-464.57 417.32,-448.82 417.32,-433.07 460.63,-389.76 460.63,-354.33 468.5,-346.46 468.5,-342.52 474.53,-342.52 483.17,-351.16 510.8,-351.16 526.47,-335.49 526.47,-168.4 509.74,-151.67 509.74,-104.02 511.81,-101.95 511.81,-74.8 ; Q3_U1.D@512.8,-43.31 Q3_U1.D@511.81,-43.31 511.81,-74.8
VDD: C1_C1.2 C1_C2.2 C1_C3.2 C1_C4.2 C18_U1.2 C18_U2.2 C18_U3.2 C18_U4.2 C18_V1.2 C18_V2.2 C18_V3.2 C18_V4.2 C18_W1.2 C18_W2.2 C18_W3.2 C18_W4.2 C20.1 C23.2 L1.1 N2.1 Q1_C1.48 Q1_C2.48 Q1_C3.48 Q1_C4.48 R11_C1.1 R11_C2.1 R11_C3.1 R11_C4.1 R17_U1.2 R17_U2.2 R17_U3.2 R17_U4.2 R17_V1.2 R17_V2.2 R17_V3.2 R17_V4.2 R17_W1.2 R17_W2.2 R17_W3.2 R17_W4.2 | length 335
  Top Layer w10: Q1_C1.48@199.8,-148.62 199.8,-165.09 208.66,-173.94 v1(208.66,-181.1)
  Top Layer w16: v1(-11.81,-492.13) v1(11.81,-492.13) v1(35.43,-492.13) C23.2@56.1,-492.13 ; C18_V1.2@86.61,-110.24 87.6,-111.22 92.52,-106.3 v1(102.36,-106.3) 117.13,-106.3 R17_V1.2@122.05,-111.22 ; R17_W1.2@429.13,-502.95 436.02,-509.84 437.99,-507.87 v1(440.94,-507.87) 440.94,-530.51 C18_W1.2@436.02,-535.43
  Bottom Layer w10: v1(-47.24,-551.18) v1(-47.24,-527.56) ; v1(-23.62,-551.18) v1(-23.62,-527.56) ; R11_C1.1@173.23,-249.02 173.23,-188.98 181.1,-181.1 v1(208.66,-181.1)
  other v1: 255.91,-60.04
VDDA: C10_C1.1 C10_C2.1 C10_C3.1 C10_C4.1 N2.2 Q1_C1.10 Q1_C2.10 Q1_C3.10 Q1_C4.10 | length 62.7
  Top Layer w10: Q1_C1.10@171.26,-354.33 189.66,-354.33 209,-334.99 v1(209,-323.18)
  Bottom Layer w10: v1(209,-323.18) C10_C1.1@212.6,-326.77
VM: 12V.1 C12_C1.1 C12_C2.1 C12_C3.1 C12_C4.1 C13_C1.1 C13_C2.1 C13_C3.1 C13_C4.1 N3.1 Q1_C1.8 Q1_C2.8 Q1_C3.8 Q1_C4.8 R14_C1.2 R14_C2.2 R14_C3.2 R14_C4.2 | length 631.5
  Top Layer w6: 12V.1@0,-35.43 12V.1@7.87,-43.31
  Top Layer w12: v1(129.92,-314.96) Q1_C1.8@171.26,-314.96
  Top Layer w30: N3.1@39.37,-43.31 66.93,-43.31
  Bottom Layer w10: v1(129.92,-314.96) 153.54,-338.58 153.54,-405.51 133.86,-425.2 133.86,-507.87 149.61,-523.62 175.74,-523.62 230.86,-468.5 R14_C1.2@242.13,-468.5
  Bottom Layer w30: C13_C1.1@86.61,-271.65 v1(129.92,-314.96)
  Bottom Layer w50: 12V.1@7.87,-43.31 149.61,-43.31
pads on no net: Q1_C1.4 Q1_C1.5 Q1_C1.14 Q1_C1.18 Q1_C1.40 Q1_C1.41 Q1_C1.43 Q1_C2.4 Q1_C2.5 Q1_C2.14 Q1_C2.18 Q1_C2.40 Q1_C2.41 Q1_C2.43 Q1_C3.4 Q1_C3.5 Q1_C3.14 Q1_C3.18 Q1_C3.40 Q1_C3.41 Q1_C3.43 Q1_C4.4 Q1_C4.5 Q1_C4.14 Q1_C4.18 Q1_C4.40 Q1_C4.41 Q1_C4.43